# Altium PCB link_t.PcbDoc
Units mil, origin at the board's own origin, x right, y up, seen from the top; angles counter-clockwise.
Board outline 2400 x 1350 mil, 2 copper layers (Top Layer, Bottom Layer); 38 components, 27 nets, 191 pads, 94 vias.
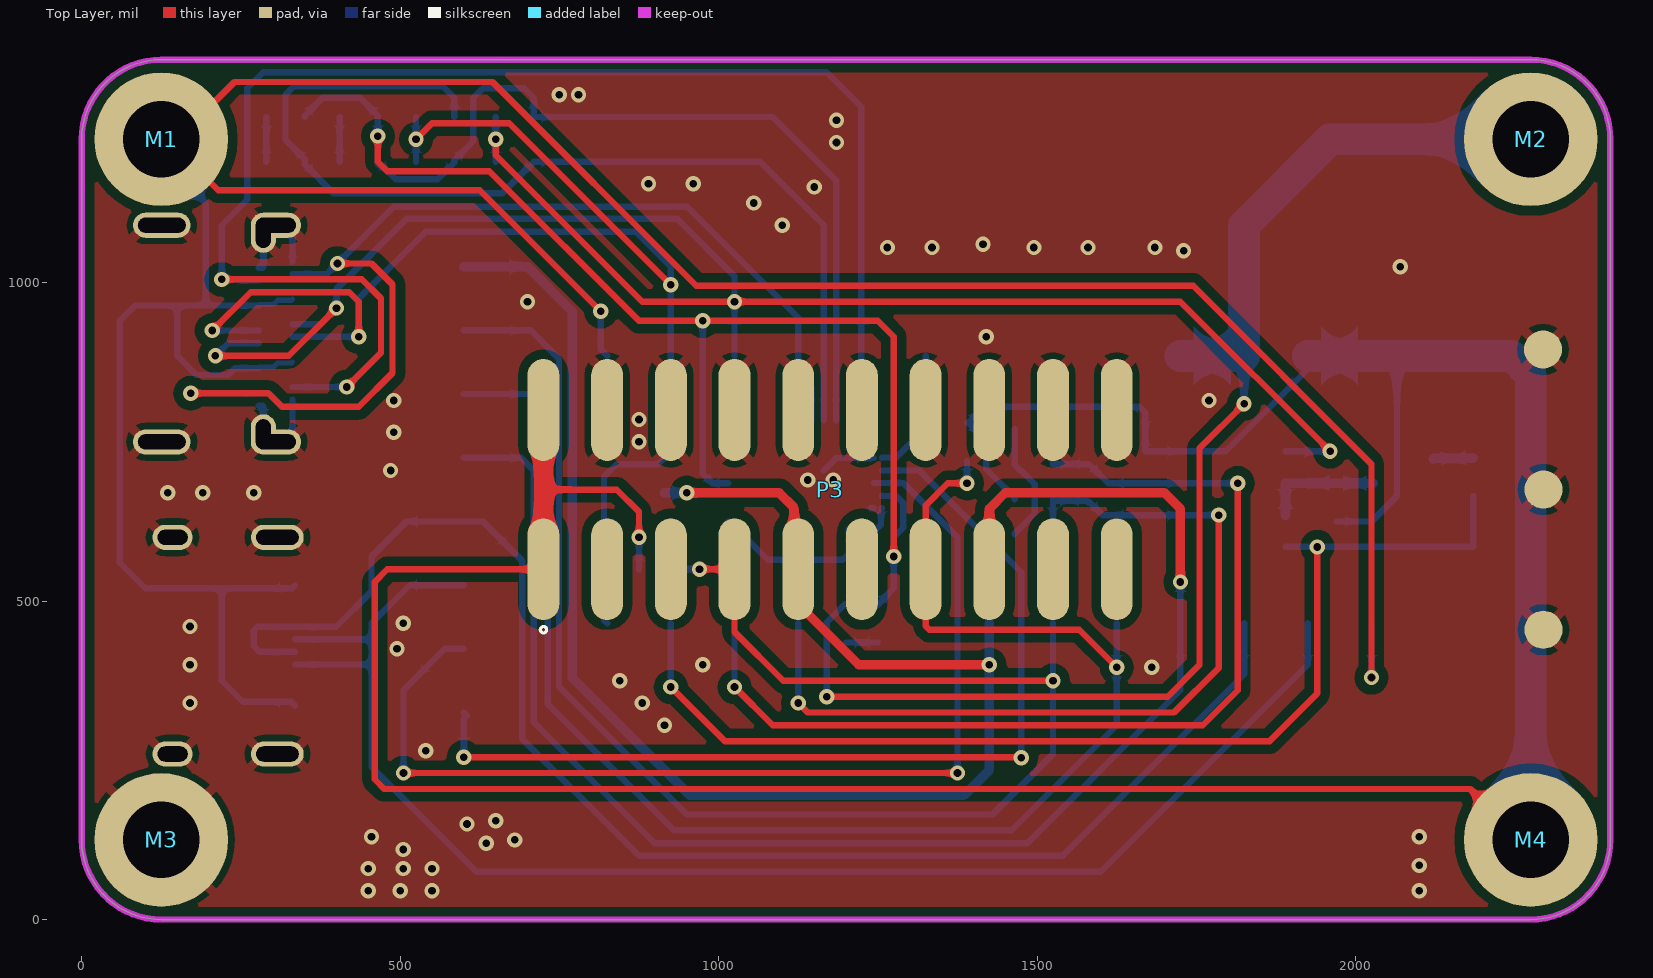
[diagram p0: Top Layer view]
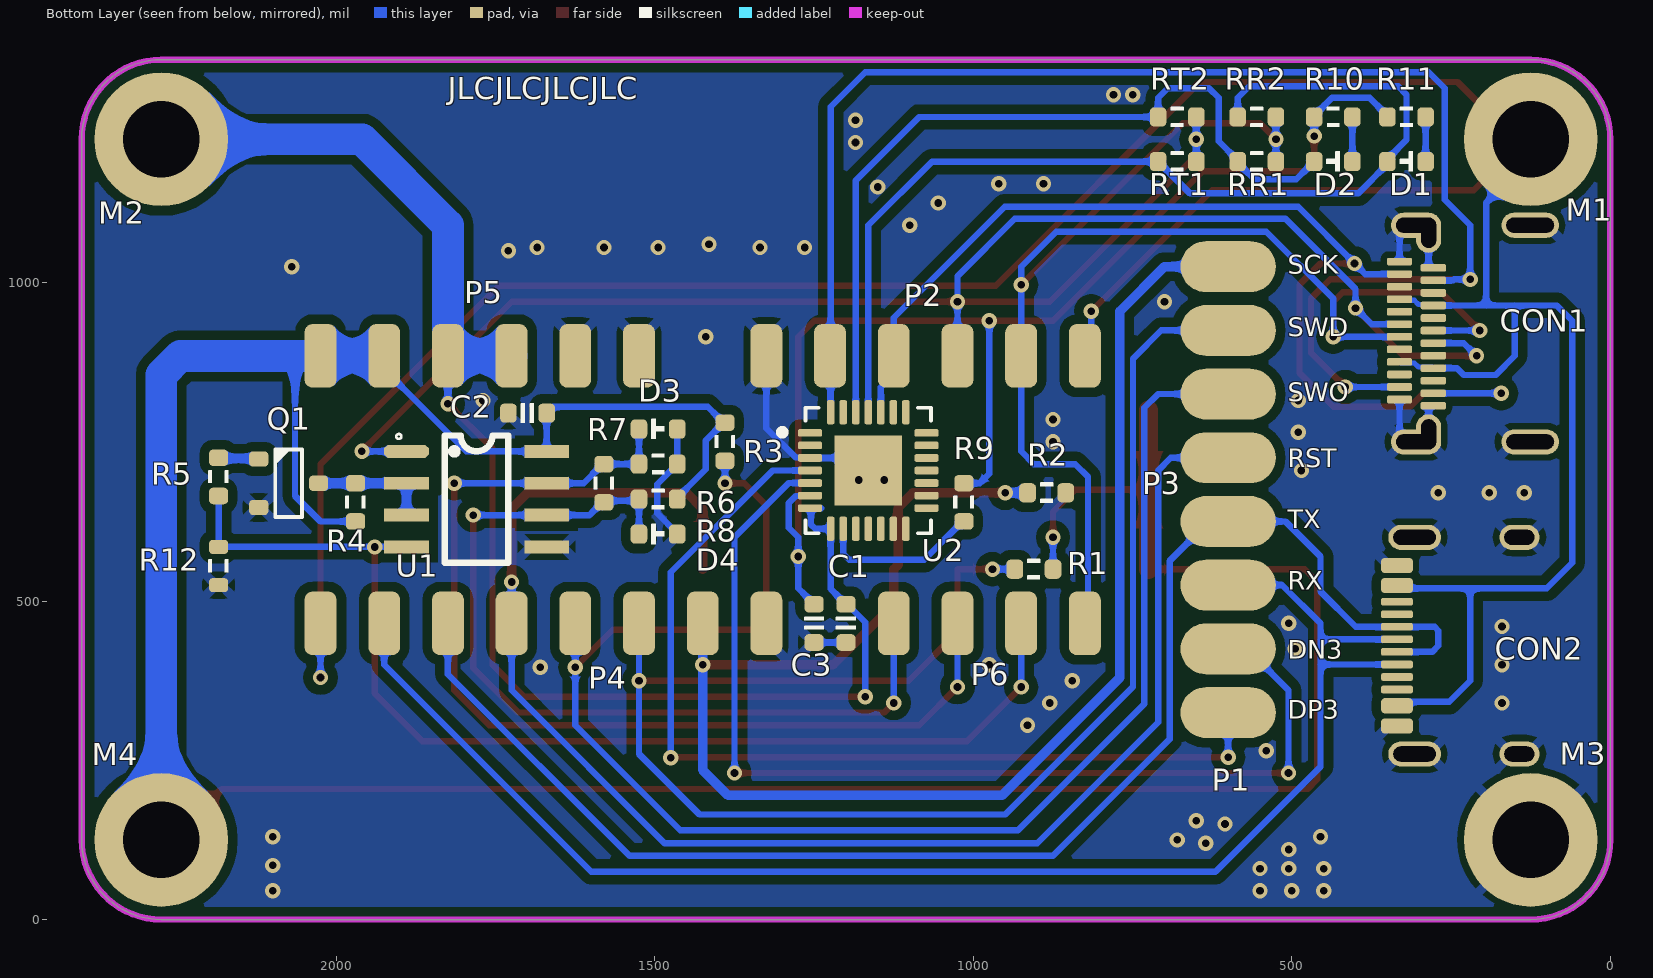
[diagram p1: Bottom Layer view, seen from below]
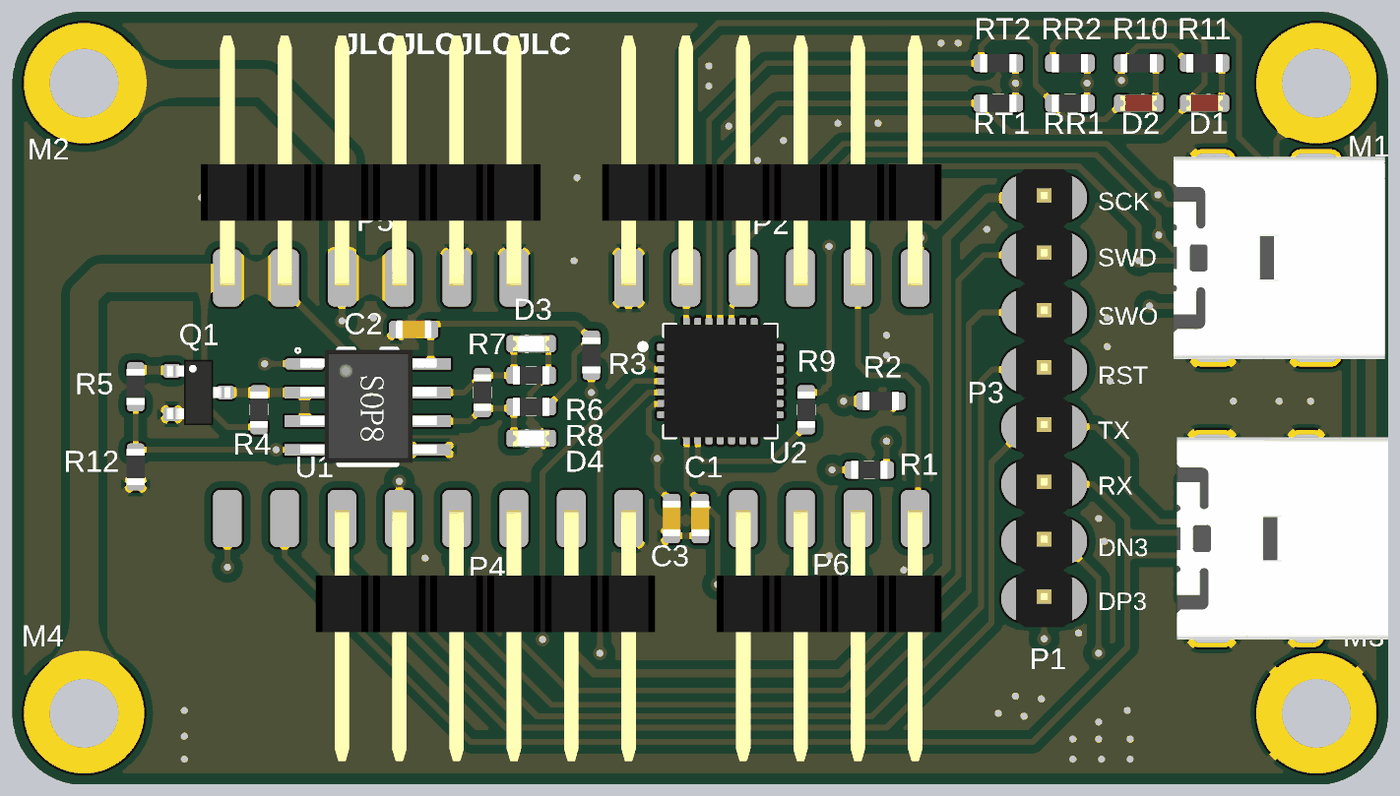
[diagram p2: 3D render of the assembled board from below, using the file's embedded part models]

## Layer stack, top to bottom
Top Solder: solder mask 0.4, Solder Resist, Dk 3.5
Top Layer: signal copper 1.4
Dielectric 1: dielectric 12.6, FR-4, Dk 4.8
Bottom Layer: signal copper 1.4
Bottom Solder: solder mask 0.4, Solder Resist, Dk 3.5

## Board outline
0,125 ccw(c125,125) 125,0 2275,0 ccw(c2275,125) 2400,125 2400,1225 ccw(c2275,1225) 2275,1350 125,1350 ccw(c125,1225) 0,1225

## Design rules (kind name [scope] priority, off if disabled: settings)
Clearance [All] p1: gap=8 ignorepadtopadclearanceinfootprint=TRUE except(15: Arc-Poly Track-Poly SMDPad-Poly THPad-Poly Via-Poly Fill-Poly Poly-Poly)
PolygonConnect [All] p1: thpad.connectstyle=Relief thpad.reliefconductorwidth=15 thpad.reliefentries=4 thpad.polygonreliefangle="45 Angle" thpad.airgapwidth=10 smdpad.connectstyle=Relief smdpad.reliefconductorwidth=15 smdpad.reliefentries=4 smdpad.polygonreliefangle="45 Angle" smdpad.airgapwidth=10 via.connectstyle=Direct via.reliefconductorwidth=10 via.reliefentries=4 via.polygonreliefangle="90 Angle" via.airgapwidth=10
RoutingVias [All] p1: holewidth=28 width=50 viastyle="Through Hole" minholewidth=28 minwidth=50 maxholewidth=28 maxwidth=50
SolderMaskExpansion [All] p1: expansion=4 istentingtop=FALSE
Width [All] p1: maxlimit=100 minlimit=6 preferedwidth=20
30 further rules are at their usual default settings.

## Components (designator, comment, footprint, x,y, rotation, side; value= is the part's Value field where it differs from the comment)
C1 "C0603" CAP_0603 1200,465 r90 bottom value=106
C2 "C0603" CAP_0603 1700,795 r180 bottom value=104
C3 "C0603" CAP_0603 1250,465 r90 bottom value=106
CON1 "USB Type C" USB_TypeC_SMD_24P 175,920 r270 bottom value="Type C"
CON2 "USB Type C" USB_TypeC_SMD_16P 185,430 r270 bottom value="Type C"
D1 "D0603" LED_0603_RED 320,1190 r0 bottom value=color?
D2 "D0603" LED_0603_RED 435,1190 r0 bottom value=color?
D3 "TVS" LED_0603_YELLOW 1495,770 r180 bottom
D4 "TVS" LED_0603_YELLOW 1495,605 r180 bottom
M1 "M3" M3 125,1225 r0 top
M2 "M3" M3 2275,1225 r0 top
M3 "M3" M3 125,125 r0 top
M4 "M3" M3 2275,125 r0 top
P1 "HDR1x8" HDR1x8_TOP 600,1025 r180 bottom value=2.54
P2 "HDR1x6" HDR1x6_TOP 1325,885 r90 bottom locked value=2.54
P3 "HDR2x10" JN_STM_20PIN 725,550 r90 top
P4 "HDR1x8" HDR1X8_H 1325,465 r270 bottom locked value=2.54
P5 "HDR1x6" HDR1x6_TOP 2025,885 r90 bottom locked value=2.54
P6 "HDR1x4" HDR1x4_TOP 825,465 r270 bottom locked value=2.54
Q1 "NAME" SOT23-3 2075,685 r180 bottom
R1 "R0603" RES_0603#1 905,550 r0 bottom value=10K
R2 "R0603" RES_0603#1 885,670 r0 bottom value=10K
R3 "R0603" RES_0603#1 1390,750 r270 bottom value=10K
R4 "R0603" RES_0603#1 1970,655 r90 bottom value=10K
R5 "R0603" RES_0603#1 2185,695 r270 bottom value=5K
R6 "R0603" RES_0603#1 1495,715 r180 bottom value=360R
R7 "R0603" RES_0603#1 1580,685 r90 bottom value=120R
R8 "R0603" RES_0603#1 1495,660 r0 bottom value=360R
R9 "R0603" RES_0603#1 1015,655 r90 bottom value=10K
R10 "R0603" RES_0603#1 435,1260 r180 bottom value=10K
R11 "R0603" RES_0603#1 320,1260 r180 bottom value=10K
R12 "R0603" RES_0603#2 2185,555 r270 bottom value=500K
RR1 "R0603" RES_0603#1 555,1190 r0 bottom value=0R
RR2 "R0603" RES_0603#1 555,1260 r0 bottom value=0R
RT1 "R0603" RES_0603#1 680,1190 r0 bottom value=0R
RT2 "R0603" RES_0603#1 680,1260 r0 bottom value=0R
U1 "SP3485" SOP8 1780,660 r180 bottom
U2 "CP2102" QFN-28 1165,705 r180 bottom value=Value

## Footprints (in the part's own frame and the unit in brackets; to place one, negate y for a bottom-side part, rotate by r counter-clockwise, add the part's x,y. Pads: shape width x height; smd on the part's side, far side on the other; paste and mask are expansions set on the pad)
CAP_0603 [mil]
  rrect50% 26x30 smd: 1(-30,0) 2(30,0)
  silkscreen extent -10,-15 10,15, body extent -31,-16 31,16, height 31
HDR1x4_TOP [mil]
  rrect50% 100x50 smd: 1(0,0) 2(0,-100) 3(0,-200) 4(0,-300)
  body extent -15,-346 424,46, height 99
HDR1x6_TOP [mil]
  rrect50% 100x50 smd: 1(0,0) 2(0,-100) 3(0,-200) 4(0,-300) 5(0,-400) 6(0,-500)
  body extent -15,-546 424,46, height 99
HDR1X8_H [mil]
  rrect50% 100x50 smd: 1(0,0) 2(0,-100) 3(0,-200) 4(0,-300) 5(0,-400) 6(0,-500) 7(0,-600) 8(0,-700)
  body extent -15,-546 424,46, height 99
HDR1x8_TOP [mil]
  oval 150x80 smd: 1(0,0) 2(0,-100) 3(0,-200) 4(0,-300) 5(0,-400) 6(0,-500) 7(0,-600) 8(0,-700)
  body extent -49,-750 49,50, height 323
JN_STM_20PIN [mil]
  oval 160x50 smd: 1(0,0) 2(250,0) 3(0,-100) 4(250,-100) 5(0,-200) 6(250,-200) 7(0,-300) 8(250,-300) 9(0,-400) 10(250,-400) 11(0,-500) 12(250,-500) 13(0,-600) 14(250,-600) 15(0,-700) 16(250,-700) 17(0,-800) 18(250,-800) 19(0,-900) 20(250,-900)
LED_0603_RED [mil]
  rrect50% 26x30 smd: 1(-30,0) 2(30,0)
  silkscreen extent -10,-16 10,16, body extent -32,-16 32,16, height 24
LED_0603_YELLOW [mil]
  rrect50% 26x30 smd: 1(-30,0) 2(30,0)
  silkscreen extent -10,-16 10,16, body extent -32,-16 32,16, height 24
M3 [mil]
  round 210 hole 120: 1(0,0)
QFN-28 [mil]
  rrect50% 38x12 smd mask+5: 1(-91.5,59.06) 2(-91.5,39.37) 3(-91.5,19.68) 4(-91.5,0) 5(-91.5,-19.68) 6(-91.5,-39.37) 7(-91.5,-59.06) 15(91.5,-59.06) 16(91.5,-39.37) 17(91.5,-19.68) 18(91.5,0) 19(91.5,19.68) 20(91.5,39.37) 21(91.5,59.06)
  rrect50% 12x38 smd mask+5: 8(-59.06,-91.5) 9(-39.37,-91.5) 10(-19.68,-91.5) 11(0,-91.5) 12(19.68,-91.5) 13(39.37,-91.5) 14(59.06,-91.5) 22(59.06,91.5) 23(39.37,91.5) 24(19.68,91.5) 25(0,91.5) 26(-19.68,91.5) 27(-39.37,91.5) 28(-59.06,91.5)
  rect 106.3x110.24 smd: 29(0,0)
  silkscreen extent -140,-99 99,99, body extent -99,-99 98,98, height 35
RES_0603#1 [mil]
  rrect50% 26x30 smd: 1(-30,0) 2(30,0)
  silkscreen extent -10,-16 10,16, body extent -31,-16 31,16, height 18
RES_0603#2 [mil]
  rrect50% 22x30 smd: 1(-30,0) 2(30,0)
  silkscreen extent -10,-16 10,16, body extent -31,-16 31,16, height 18
SOP8 [mil]
  oct 70x20 smd: 1(-110,75)
  rect 70x20 smd: 2(-110,25) 3(-110,-25) 4(-110,-75) 5(110,-75) 6(110,-25) 7(110,25) 8(110,75)
  silkscreen extent -126,-100 50,102, body extent -118,-98 120,100, height 63
SOT23-3 [mil]
  rrect50% 30x24 smd: 1(-47,38) 2(-47,-38) 3(47,0)
  silkscreen extent -21,-53 21,53, body extent -55,-57 55,57, height 51
USB_TypeC_SMD_16P [mm]
  oval 1x1.6 hole 0.6 slot 1.2 at 90 deg: 0(-4.32,1.075) 0(4.32,1.075)
  oval 1x2.1 hole 0.6 slot 1.7 at 90 deg: 0(-4.32,-3.105) 0(4.32,-3.105)
  rrect50% 0.61x1.27 smd: A1B12(3.2,-3.81) A4B9(2.4,-3.81) A9B4(-2.4,-3.81) A12B1(-3.2,-3.81)
  rrect50% 0.305x1.27 smd: A5(1.25,-3.81) A6(0.25,-3.81) A7(-0.25,-3.81) A8(-1.25,-3.81) B5(-1.75,-3.81) B6(-0.75,-3.81) B7(0.75,-3.81) B8(1.75,-3.81)
  body extent -4.48,-4.65 4.48,4.7, height 3.21
USB_TypeC_SMD_24P [mil]
  oval 39.37x78.74 hole 23.62 slot 62.99 at 90 deg: 0(-170.08,-129.92) 0(170.08,-129.92)
  oval 39.37x90.55 hole 23.62 slot 74.8 at 90 deg: 0(-170.08,49.21) 0(170.08,49.21)
  oval 62.99x39.37 hole 23.62 slot 47.24 at 0 deg: 0(-158.27,-110.24) 0(158.27,-110.24)
  rrect50% 12x40 smd: A1(103.54,-156) A2(83.86,-156) A3(64.17,-156) A4(44.49,-156) A5(24.8,-156) A6(5.12,-156) A7(-14.57,-156) A8(-34.25,-156) A9(-53.94,-156) A10(-73.62,-156) A11(-93.31,-156) A12(-112.99,-156) B1(-103.15,-102.87) B2(-83.46,-102.87) B3(-63.78,-102.87) B4(-44.09,-102.87) B5(-24.41,-102.87) B6(-4.72,-102.87) B7(14.96,-102.87) B8(34.65,-102.87) B9(54.33,-102.87) B10(74.02,-102.87) B11(93.7,-102.87) B12(113.39,-102.87)
  body extent -176,-199 176,169, height 126

## Part data
C1 C2 C3: library part Cap_0603, "Capacitor", Note=±10%, Specification="X7R, ±10%, 16V", Type=0603
CON1: library part USB_TypeC, "USB"
CON2: library part USB_TypeC_16P, "USB"
D1 D2: library part LED_0603, "LED", Type=0603
D3 D4: library part "ESD LESD5D5.0CT1G", "静电保护二极管,VRWM=5V.IPP=9.4A"
M1 M2 M3 M4: "M3 Nut"
P1 P4: library part HDR1x8_2.54TOP, "Header Top", Type="DIP 1x8"
P2 P5: library part HDR1x6_2.54TOP, "Header Top", Type="DIP 1x6"
P3: library part HDR2x10_2.54, "Header"
P6: library part HDR1x4_2.54TOP, "Header Top", Type="DIP 1x4"
Q1: library part BJT_NPN, "Transistor", Note=NPN, Type=SOT32-3
R1 R2 R3 R4 R5 R6 R7 R8 R9 R10 R11 R12 RR1 RR2 RT1 RT2: library part Res_0603, "Resistor", Note=±1%, Specification=±1%, Type=0603
U1: "半双工收发器"
U2: "USB转TTL", MFG #1="SILICON LABS", PART DESC="SINGLE-CHIP USB TO UART BRIDGE, QFN28, RoHS.", PART NUMBER=CP2102, RefDes=RefDes, Type=DEV

## Free pads (board coordinates)
  round 60 smd: 0(2294.39,895) 0(2295,455) 0(2295,675)

## Via types
v1: diameter 24, hole 12, Top Layer to Bottom Layer, tented both sides, 79 vias
v2: diameter 24/24 (per signal layer), hole 12, Top Layer to Bottom Layer, tented both sides, 15 vias

## Nets (pads, with @x,y where several pads share a name; then routed paths per layer and width w, separated by ;. In a path a pad name is that pad's centre, name@x,y a point inside that pad or via, vN(x,y) a via of type N, cw(c..) or ccw(c..) an arc to the next point about the centre after c; other vN are vias at no path point)
3.3V: C2.2 M4.1 P3.1 P3.2 P5.1 P5.2 R1.1 R3.1 R4.1 R8.1 U1.8 | length 5201
  Top Layer w10: P3.1 480,550 460,530 460,220 475,205 2180,205 2260,125 M4.1 ; 725,675 840,675 875,640 v1(875,600)
  Top Layer w30: P3.1 725,675 P3.2
  Bottom Layer w10: R1.1 v1(875,600) ; R3.1 R3.1@1392,780 ; R8.1 1465,662 1420,707 1420,752 R3.1@1392,780 ; P5.2 1925,864.06 1795.94,735 U1.8 C2.2 1670,796.19 1662.11,804.07 1660.93,804.07 1660,805 1417,805 R3.1@1392,780 ; R4.1 2025,625 2065,665 2065,885
  Bottom Layer w50: P5.2 P5.1 2065,885 2245,885 2275,855 M4.1
5.0V: C1.2 M2.1 P5.3 P5.4 U2.7 U2.8 | length 2281.7
  Top Layer w10: v1(1170,350) 1705,350 1755,400 1755,740 v1(1825,810)
  Bottom Layer w10: v1(1170,350) 1170,467 C1.2@1198,495 ; C1.2 1201.19,495 1209.07,502.89 1209.07,504.07 1224.06,519.06 U2.8 1248.5,613.5 1255,620 1255,644.94 1256,645.94 U2.7 ; U2.7@1239.14,645.94 U2.7@1244,645.94 ; v1(1825,810) P5.3
  Bottom Layer w50: P5.4 P5.3 1825,1090 1960,1225 M2.1
A: D4.1 P6.4 R7.1 R8.2 U1.6 | length 1385.6
  Top Layer w10: v2(1125,340) 1140,325 1715,325 1785,395 v1(1785,635)
  Bottom Layer w10: v2(1125,340) P6.4 ; D4.1 R8.2 1527.5,657.5 1577.5,657.5 R7.1 1582.81,655 1602.81,635 U1.6 v1(1785,635)
B: D3.1 P6.3 R6.1 R7.2 U1.7 | length 1620.1
  Top Layer w10: v2(1025,365) 1085,305 1760,305 1815,360 v1(1815,685)
  Bottom Layer w10: v2(1025,365) P6.3 ; D3.1 R6.1 R7.2 1582,715 1612,685 U1.7 v1(1815,685)
CP2102_DTR: CON1.A2 CON1.B2 P2.2 U2.28 | length 2372.6
  Top Layer w10: v1(220,1005) 440,1005 470,975 470,890 v1(416.14,836.14)
  Bottom Layer w10: CON1.B2 246.54,1003.46 245,1005 v1(220,1005) 220,1090 260,1130 260,1305 285,1330 1170,1330 1224.13,1275.87 1224.13,784.08 U2.28@1224.06,784 ; CON1.A2 v1(416.14,836.14)
CP2102_RTS: CON1.A11 CON1.B11 P2.3 U2.24 | length 1772.4
  Top Layer w10: v1(171.3,826.3) 293.21,826.3 314.51,805 435,805 488,858 488,997 455,1030 v1(401.57,1030)
  Bottom Layer w10: v1(171.3,826.3) CON1.B11 ; CON1.A11 384.52,1013.31 401.21,1030 490.21,1119 951,1119 1125,945 1125,855.94 1145.32,835.63 U2.24 U2.24@1145.32,784
CP2102_RX: D1.2 RR2.2 RT1.2 U2.25 | length 1632.1
  Bottom Layer w10: RR2.2 585,1290 567,1308 333,1308 320,1295 320,1224 350,1194 D1.2 350,1186 396,1140 660,1140 700,1180 701.19,1180 710,1188.81 RT1.2 1065,1190 1165,1090 U2.25@1165,784
CP2102_TX: D2.2 RR1.2 RT2.2 U2.26 | length 1288.7
  Bottom Layer w10: D2.2 465,1186.27 470.96,1180.31 474.69,1180.31 493,1162 559,1162 585,1188 585,1192 615,1222 615,1290 630,1305 695,1305 710,1290 RT2.2 1085,1260 1184.68,1160.32 U2.26@1184.68,784
CP_VDD: C3.2 R9.2 R10.1 R11.1 U2.6 | length 1981.9
  Top Layer w10: v1(465,1230) 465,1190 480,1175 640,1175 875,940 v2(975,940) 1250,940 1275,915 v1(1275,570)
  Bottom Layer w10: R11.1 350,1262 378,1290 437,1290 465,1262 R10.1 v1(465,1230) ; v2(975,940) 975,700 990,685 R9.2 ; C3.2 1251.19,495 1260,503.81 1260,505 1275,520 v1(1275,570) 1275,600 1290,615 1290,654.07 1279.13,664.94 1257.18,664.94 U2.6
CPOUT_RX: CON1.A7 CON1.B7 P2.4 RT1.1 RT2.1 U1.1 | length 2907.8
  Top Layer w10: v1(210,885) 325,885 v1(400,960) ; v1(650,1225) 650,1200 880,970 v1(1025,970) 1725,970 v1(1960,735)
  Bottom Layer w10: v1(210,885) 230.04,905.04 CON1.B7 ; CON1.A7@331.43,935 CON1.A7 374.57,934.57 v1(400,960) 400,990 510,1100 935,1100 1025,1010 v1(1025,970) P2.4 ; RT1.1 v1(650,1225) RT2.1 ; U1.1 v1(1960,735)
CPOUT_TX: CON1.A6 CON1.B6 P2.5 P6.1 RR1.1 RR2.1 | length 2340.5
  Top Layer w10: v1(205,924.72) 265.28,985 420,985 435,970 v1@435,920 ; v1@430,920 v1(435,915) ; v1(525,1225) 550,1250 671.46,1250 v1(925,996.46)
  Bottom Layer w10: v1(205,924.72) CON1.B6 ; CON1.A6 434.88,914.88 v1(435,915) 435,975 540,1080 870,1080 925,1025 v1(925,996.46) P2.5 925,735 905,715 840,715 820,695 820,470 P6.1 ; RR1.1 v1(525,1225) RR2.1
DN3: P1.7 U2.5 | length 1657.9
  Top Layer w10: v1(505.18,230.18) 505.36,230 v1(1375,230)
  Bottom Layer w10: v1(505.18,230.18) 505.18,360.18 570,425 P1.7 ; U2.5@1244,685.32 U2.5 1289.68,685.32 1375,600 v1(1375,230)
DP3: P1.8 U2.4 | length 1525.3
  Top Layer w10: v1(600,255) 1474,255 v1(1475,254)
  Bottom Layer w10: v1(600,255) 600,315 605,320 P1.8 ; U2.4 1315,705 1475,545 v1(1475,254)
EN485: P6.2 R5.2 R12.1 U1.4 | length 1786.3
  Top Layer w10: v2(925,365) 1010,280 1865,280 1940,355 v2(1940,585)
  Bottom Layer w10: v2(925,365) P6.2 ; U1.4 v2(1940,585) R12.1 R5.2
GND: C1.1 C2.1 C3.1 CON1.0 CON1.A1 CON1.A12 CON1.B1 CON1.B12 CON2.0 CON2.A1B12 CON2.A12B1 D3.2 D4.2 M3.1 P2.1 P3.4 P3.6 P3.8 P3.10 P3.12 P3.14 P3.16 P3.18 P3.20 P4.1 P5.5 P5.6 pad.0 Q1.2 R2.1 R6.2 R12.2 U1.5 U2.3 U2.29 | length 803.1
  Bottom Layer w10: CON1.B12 284.24,806.61 285.24,805.61 CON1.0@285.24,761.73 ; CON1.B1 284.24,1023.15 285.24,1024.15 CON1.0@285.24,1078.27 ; CON1.0@304.92,749.92 316.66,749.92 331,764.26 CON1.A1 ; CON1.0@304.92,1090.08 316.66,1090.08 331,1075.74 CON1.A12 ; U2.29 1184.68,724.68 U2.3@1244,724.68 ; C1.1 C3.1 ; U2.3 1257.19,725.37 1279.13,725.37 1325,771.24 P2.1 ; D4.2 1465,606.19 1496.58,637.77 1496.58,683.42 1475,705 1473.81,705 1465,713.81 D3.2
  other v1: 450,45 500,45 550,45 2100,45 450,80 505,80 550,80 2100,85 505,110 635,120 680,125 455,130 2100,130 605,150 650,155 170,340 1680,396 170,400 975,400 170,460 505,465 135,670 190,670 270,670 1140,690 1180,690 485,705 875,750 490,765 875,785 490,815 1770,815 1420,915 700,970 2070,1025 1730,1050 1265,1055 1335,1055 1495,1055 1580,1055 1685,1055 1415,1060 1100,1090 1055,1125 1150,1150 890,1155 960,1155
  other v2: 540,265 915,305 880,340 845,375 495,425 1185,1220 1185,1255 750,1295 780,1295
NetD1_1: D1.1 R11.2 | length 70
  Bottom Layer w10: D1.1 R11.2
NetD2_1: D2.1 R10.2 | length 70
  Bottom Layer w10: D2.1 R10.2
NetQ1_1: Q1.1 R5.1 | length 63.8
  Bottom Layer w15: Q1.1 2123,724 2184,724 R5.1
NetR9_1: R9.1 U2.9 | length 257.5
  Bottom Layer w10: R9.1 1017,625 1077,565 1195,565 1204.37,574.37 U2.9@1204.37,613.76
OUT_RST: P1.4 P3.15 P4.5 | length 2407.1
  Top Layer w15: P3.15 1425,645 1450,670 1700,670 1725,645 v1(1725,530)
  Bottom Layer w10: P1.4 690,725 710,705 710,310 900,120 1485,120 1725,360 P4.5 v1(1725,530)
OUT_RX: CON2.A7 CON2.B7 P1.6 P4.7 | length 2372.8
  Bottom Layer w10: CON2.B7 455,400.47 ; CON2.A7 455,439.84 ; P1.6 515,525 455,465 455,439.84 ; P4.7 1925,400 1600,75 620,75 455,240 455,400.47 ; 455,400.47 455,439.84
OUT_SCK: P1.1 P3.9 P4.2 R2.2 | length 2459
  Top Layer w15: v1(950,670) 1095,670 1118.3,646.7 1118.3,556.7 P3.9 1125,495 1220,400 v1(1425,400)
  Bottom Layer w15: P1.1 700,1025 770,955 770,380 955,195 1385,195 1425,235 v1(1425,400) P4.2 ; R2.2 v1(950,670)
OUT_SWD: P1.2 P3.7 P4.3 R1.2 | length 2506
  Top Layer w10: v1(970,550) P3.7 1025,451.5 1101.5,375 v2(1525,375)
  Bottom Layer w10: P1.2 705,925 749.5,880.5 749.5,365.5 950,165 1430,165 1525,260 P4.3 ; R1.2 v1(970,550)
OUT_SWO: P1.3 P3.13 P4.4 R3.2 | length 2440
  Top Layer w10: v1(1390,685) 1360,685 1325,650 P3.13 1325,460.86 1330.86,455 1566,455 v1(1625,396)
  Bottom Layer w10: P1.3 710,825 731.5,803.5 731.5,338.5 930,140 1460,140 1625,305 1625,390 P4.4 ; v1(1390,685) R3.2
OUT_TX: CON2.A6 CON2.B6 P1.5 P4.6 | length 2330.5
  Bottom Layer w10: CON2.A6 279.84,420.16 270,430 270,453.67 275.86,459.53 CON2.B6 399.53,459.53 455,515 455,570 510,625 P1.5 630,625 692,563 692,283 875,100 1540,100 1825,385 P4.6
RS485_DE: Q1.3 R4.2 U1.2 U1.3 | length 188
  Bottom Layer w15: U1.3 U1.2 R4.2 Q1.3
VCC_OUT: CON1.A4 CON1.A9 CON1.B4 CON1.B9 CON2.A4B9 CON2.A9B4 M1.1 P2.6 P4.8 | length 5281.6
  Top Layer w10: M1.1 M1.1@134.71,1225 ; v1(815,955) 723.66,1046.34 625,1145 214.71,1145 M1.1@134.71,1225 ; v1(2025,380) 2025,715 1745,995 965,995 645,1315 240,1315 150,1225 M1.1@134.71,1225
  Bottom Layer w8: CON1.B9 279.56,867.35 301.31,867.35 307.79,873.83 329.32,873.83 CON1.A4 ; CON1.B4 279.56,965.78 301.31,965.78 307.79,972.25 329.32,972.25 CON1.A9
  Bottom Layer w10: M1.1 125,1195.29 195,1125.29 195,964.09 ; CON1.B9 240.67,865.67 230,855 180,855 150,885 150,964.09 ; CON1.B4 195,964.09 ; CON2.A4B9 328.62,341.89 253.11,341.89 220,375 220,520 ; CON2.A9B4 330.51,520 220,520 ; v1@817.68,952.32 v1(815,955) 815,895 P2.6 ; v1(2025,380) P4.8 ; 150,964.09 84.09,964.09 60,940 60,560 100,520 220,520 ; 150,964.09 195,964.09
pads on no net: CON1.A3 CON1.A5 CON1.A8 CON1.A10 CON1.B3 CON1.B5 CON1.B8 CON1.B10 CON2.A5 CON2.A8 CON2.B5 CON2.B8 P3.3 P3.5 P3.11 P3.17 P3.19 U2.1 U2.2 U2.10 U2.11 U2.12 U2.13 U2.14 U2.15 U2.16 U2.17 U2.18 U2.19 U2.20 U2.21 U2.22 U2.23 U2.27

## Polygon pours and split planes (outlines as drawn)
GND on Top Layer "GND_L01_P000" (solid, pour order 0): 0,0 2400,0 2400,1350 0,1350
GND on Bottom Layer "GND_L02_P001" (solid, remove dead copper, pour order 1): 0,0 2400,0 2400,1350 0,1350

## Keep-outs
Keep-Out Layer:
  the board outline again, w10

## Silkscreen, mask and mechanical layers (free items; w line width, h text height)
Top Overlay:
  circle w5: c725,455 r5
Bottom Overlay:
  text "JLCJLCJLCJLC" at 1825,1275.72 h60
  text "SCK" at 506.47,1003.55 h50
  text "SWD" at 506.47,905.55 h50
  text "SWO" at 506.47,803.55 h50
  text "RST" at 506.47,700.05 h50
  text "TX" at 506.47,603.83 h50
  text "RX" at 506.47,507.53 h50
  text "DN3" at 506.47,399.38 h50
  text "DP3" at 506.47,305.38 h50
Top Solder:
  lines w10: 785,25 785,180 1160,180 1160,25 ; 790,1210 790,1325 ; 820,80 820,30 920,30 920,80 ; 820,1180 1362.5,1180 1362.5,1322.5
  text "VCC" at 800,1320 h66 r270
  text "TX" at 900,1320 h66 r270
  text "RX" at 1000,1320 h66 r270
  text "RTS" at 1100,1320 h66 r270
  text "DTR" at 1200,1320 h66 r270
  text "GND" at 1300,1320 h66 r270
  text "SILAB" at 1375.6,1320 h50 r270
  text "GND" at 1495,1320 h66 r270
  text "GND" at 1600,1320 h66 r270
  text "5.0V" at 1700,1320 h66 r270
  text "5.0V" at 1800,1320 h66 r270
  text "3.3V" at 1895,1320 h66 r270
  text "3.3V" at 2000,1320 h66 r270
  text "VCC" at 255.67,1290 h60 r270
  text "5.0V" at 2335.72,1110 h60 r270
  text "UART" at 30.84,1020 h70 r270
  text "SILAB" at 90.6,1000 h50 r270
  text "LINK-T" at 2150,935 h120 r270
  text "S" at 2340,910 h50 r270
  text "J" at 2340,690 h50 r270
  text "fzxhub" at 2080,615 h70 r270
  text "-1.1.2" at 2150,575 h70 r270
  text "UART" at 30.84,500 h70 r270
  text "LINKS" at 90.6,480 h50 r270
  text "D" at 2340,470 h50 r270
  text "3.3V" at 2330.72,340 h60 r270
  text "EN" at 800,165 h66 r270
  text "EN" at 900,165 h66 r270
  text "485B" at 1000,165 h66 r270
  text "485A" at 1100,165 h66 r270
  text "SILAB" at 1170.6,165 h50 r270
  text "GND" at 1295,165 h66 r270
  text "SCK" at 1400,165 h66 r270
  text "SWD" at 1500,165 h66 r270
  text "SWO" at 1600,165 h66 r270
  text "RST" at 1700,165 h66 r270
  text "TX" at 1800,165 h66 r270
  text "RX" at 1895,165 h66 r270
  text "VCC" at 1995,165 h66 r270
  text "GND" at 255.72,150 h60 r270
Mechanical 1:
  circle w2: c251.77,1053.86 r7.87
  circle w2: c251.77,786.14 r7.87
  circle w2: c287.88,316.14 r9.73
  circle w2: c287.88,543.7 r9.73
  lines w10: 0,125 ccw(c125,125) 125,0 2275,0 ccw(c2275,125) 2400,125 2400,1225 ccw(c2275,1225) 2275,1350 125,1350 ccw(c125,1225) 0,1225 0,125